# Altium PCB LC_MATCH_0.PcbDoc
Units mm, origin at the board's own origin, x right, y up, seen from the top; angles counter-clockwise.
Board outline 44.45 x 33.53 mm, 2 copper layers (Top Layer, Bottom Layer); 7 components, 5 nets, 14 pads, 12 vias.
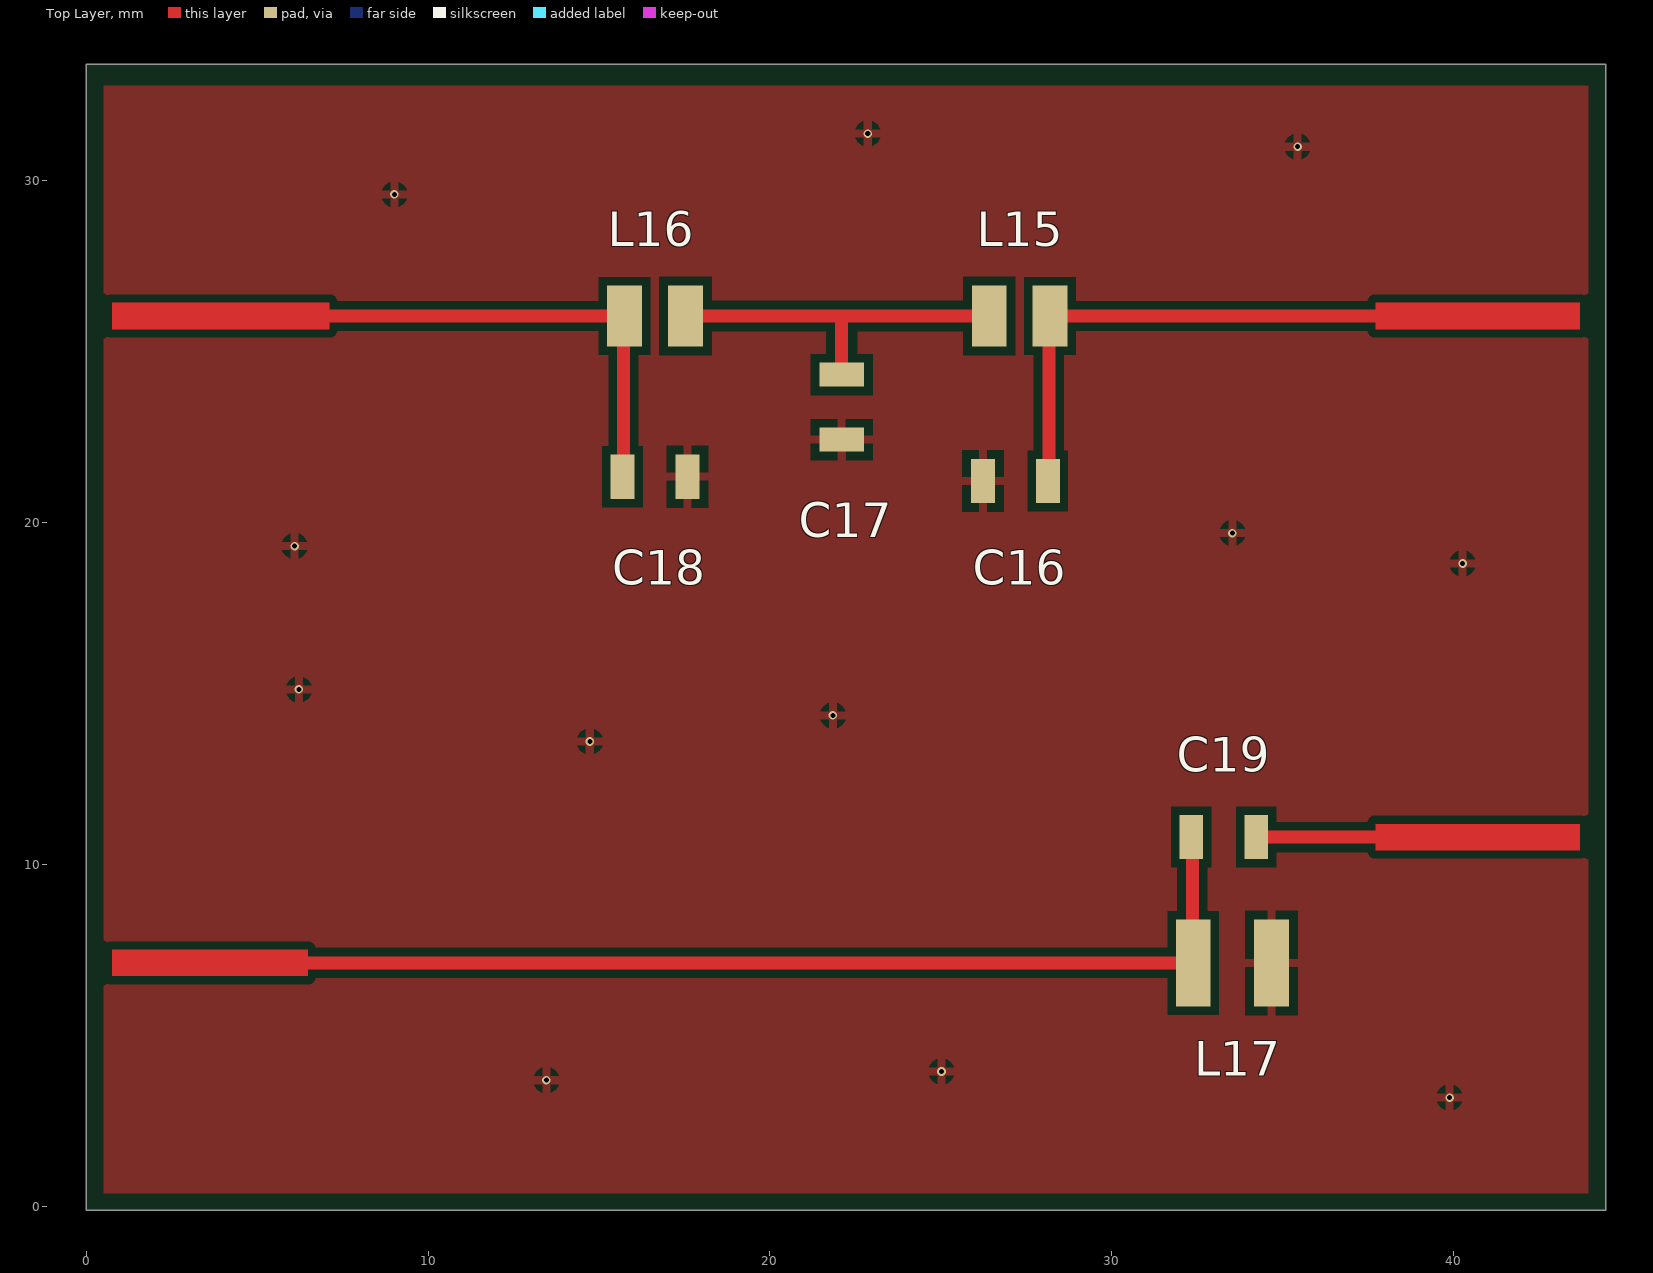
[diagram p0: Top Layer view]
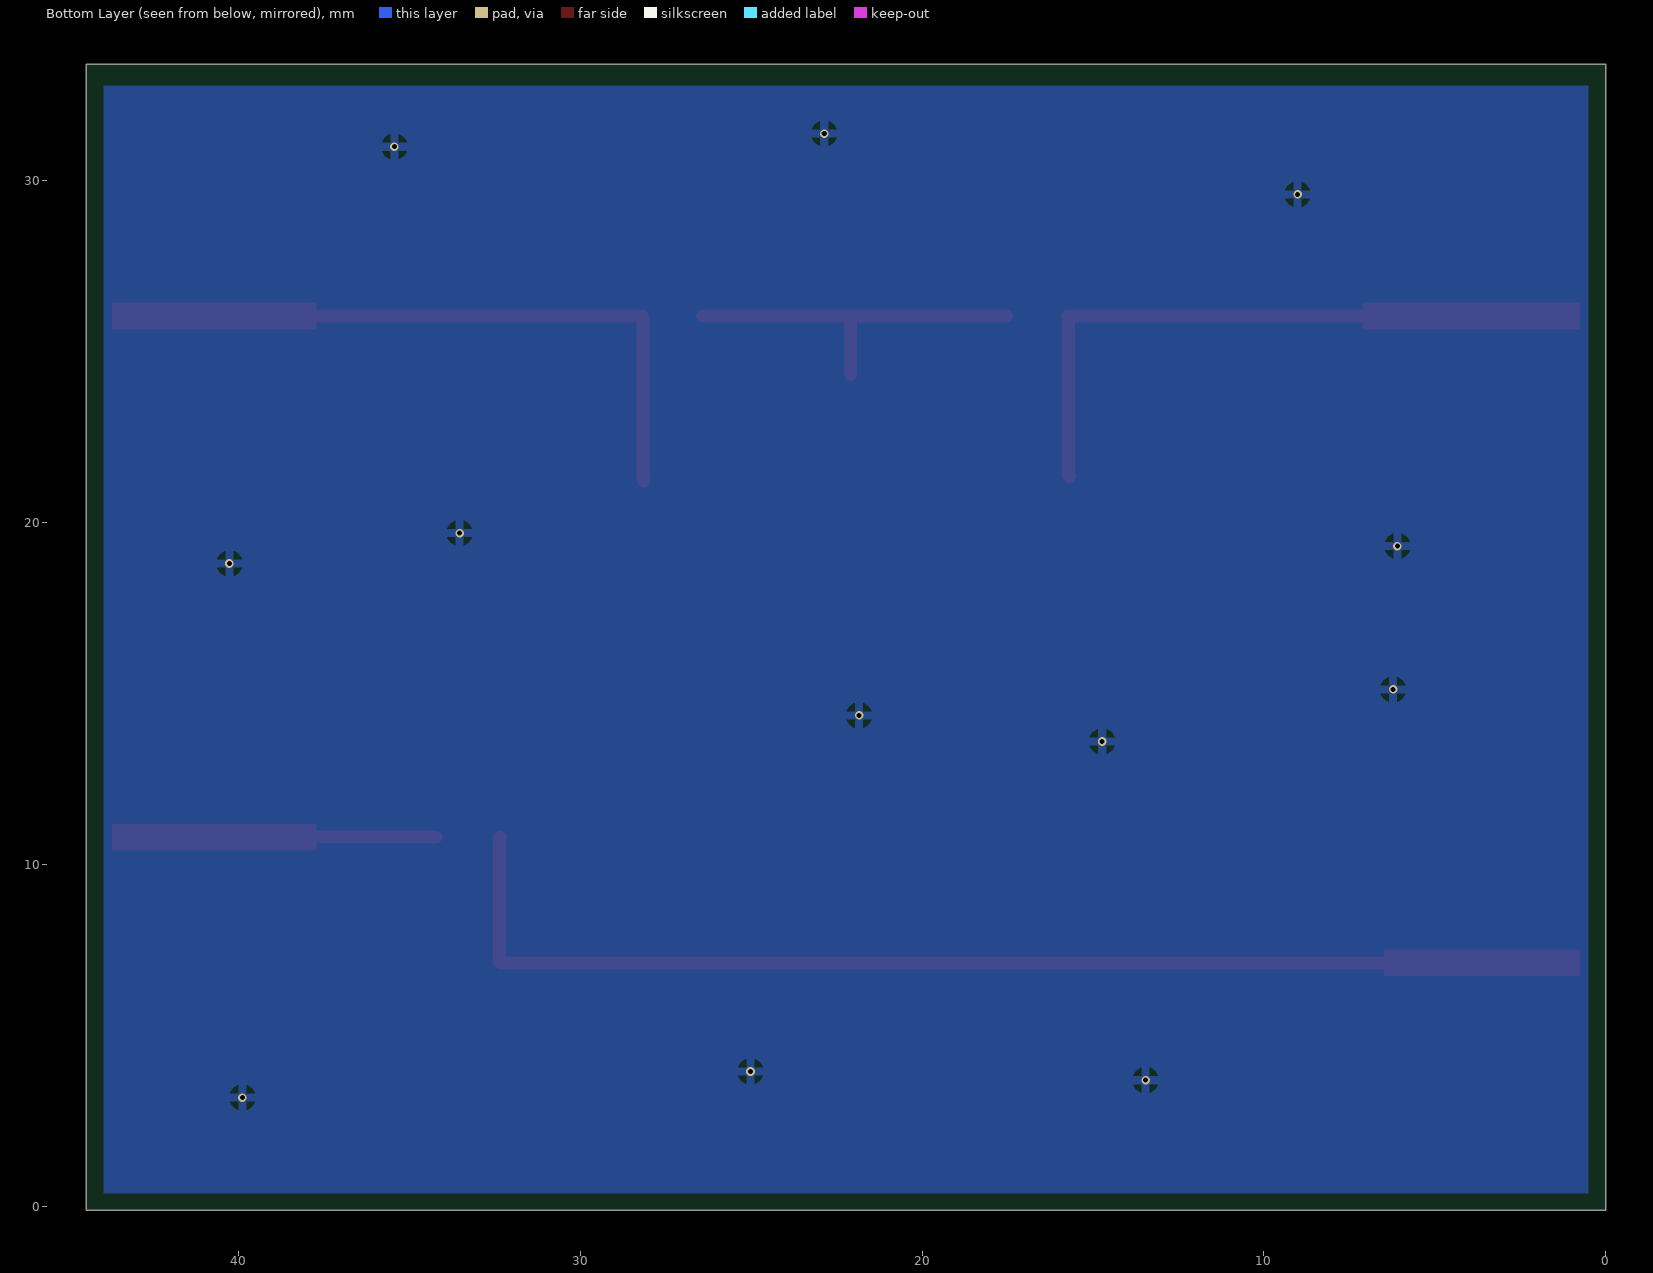
[diagram p1: Bottom Layer view, seen from below]
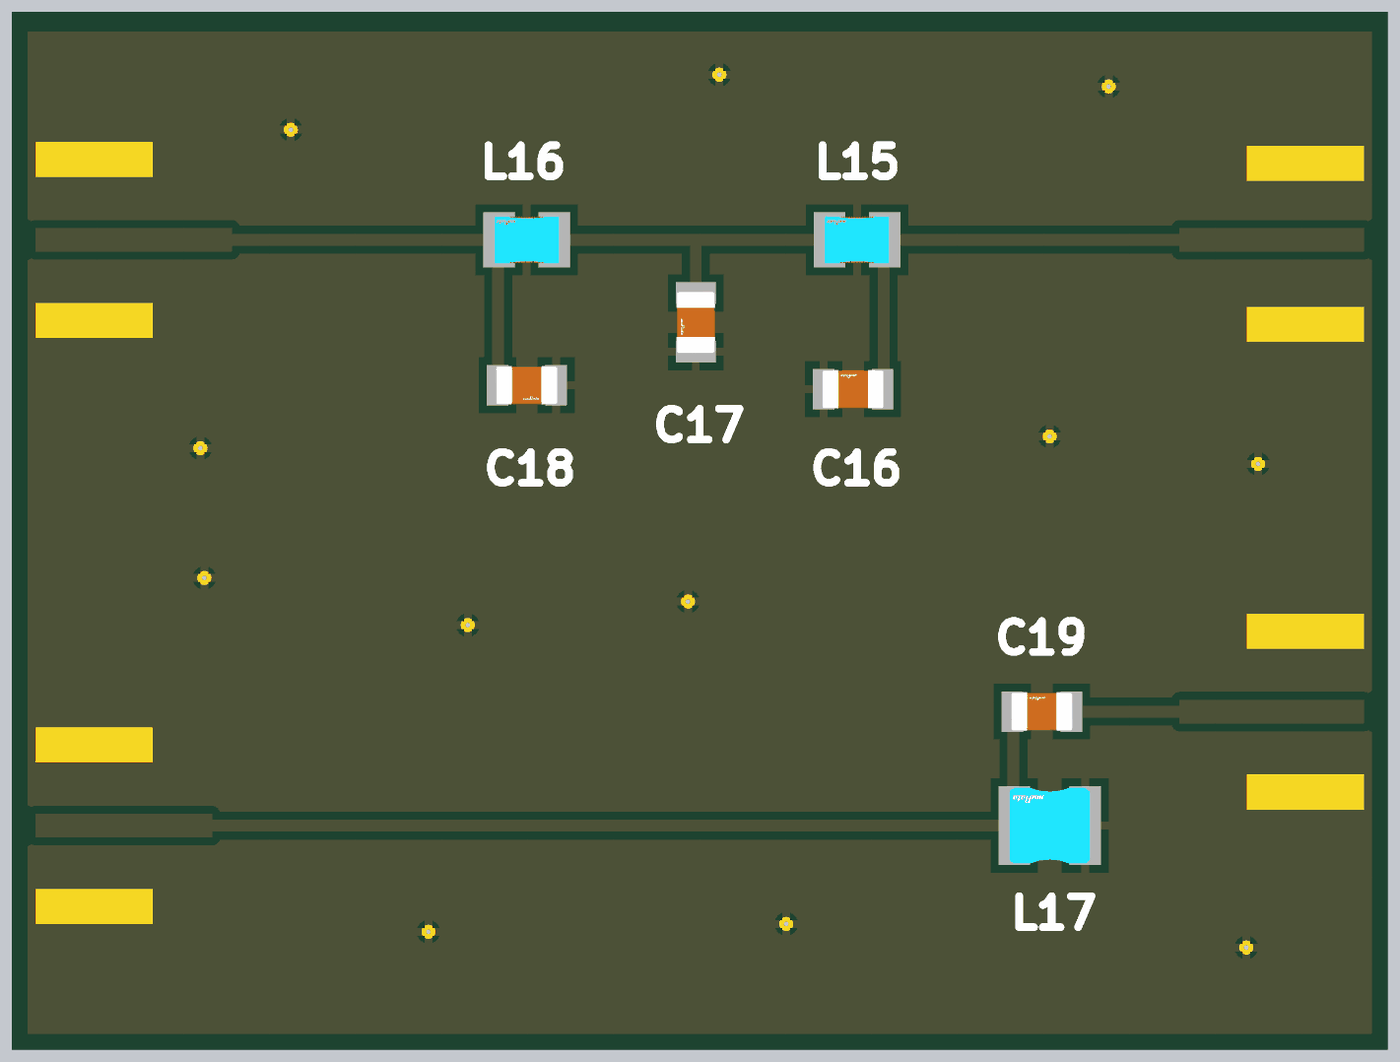
[diagram p2: 3D render of the assembled board from above, using the file's embedded part models]

## Layer stack, top to bottom
Top Solder: solder mask 0.0102, Solder Resist, Dk 3.5
Top Layer: signal copper 0.0356
Dielectric 1: dielectric 0.32, FR-4, Dk 4.8
Bottom Layer: signal copper 0.0356
Bottom Solder: solder mask 0.0102, Solder Resist, Dk 3.5

## Board outline
0,-0.127 44.45,-0.127 44.45,33.401 0,33.401

## Design rules (kind name [scope] priority, off if disabled: settings)
Clearance [All] p1: gap=0.254 ignorepadtopadclearanceinfootprint=FALSE except(0: Arc-Hole Track-Hole SMDPad-Hole THPad-Hole Via-Hole Fill-Hole Poly-Hole Region-Hole Text-Hole; 0.15: Arc-Arc Arc-Track Arc-SMDPad Track-Track Track-SMDPad SMDPad-SMDPad; 0.5: THPad-THPad)
MinimumSolderMaskSliver [All] p1: minsoldermaskwidth=0.1
PolygonConnect [All] p1: connectstyle=Relief reliefconductorwidth=0.254 reliefentries=4 polygonreliefangle="90 Angle" airgapwidth=0.254
RoutingLayers [All] p1: top layer_v5=TRUE bottom layer_v5=FALSE
RoutingVias [All] p1: holewidth=0.15 width=0.25 viastyle="Through Hole" minholewidth=0.15 minwidth=0.25 maxholewidth=0.2 maxwidth=0.3
SolderMaskExpansion [All] p1: expansion=0.102 istentingtop=FALSE
Width [All] p1: maxlimit=0.9 minlimit=0.15 preferedwidth=0.254 minimp=50.000000 maximp=50.000000 favimp=50.000000
28 further rules are at their usual default settings.

## Components (designator, comment, footprint, x,y, rotation, side; value= is the part's Value field where it differs from the comment)
C16 "GQM2195C2E300GB12D" FP-GRM21A-0_2-MFG 27.178,21.209 r180 top
C17 "GQM2195C2E430GB12D" FP-GRM21A-0_2-MFG 22.098,23.368 r270 top
C18 "GQM2195C2E300GB12D" FP-GRM21A-0_2-MFG 16.637,21.336 r0 top
C19 "GRM21A5C2E102FWA1D" FP-GRM21A-0_2-MFG 33.274,10.795 r180 top
L15 "LQW2BAS56NG00L" FP-LQW2BAN_00-MFG 27.305,26.035 r180 top
L16 "LQW2BAS56NG00L" FP-LQW2BAN_00-MFG 16.637,26.035 r180 top
L17 "LQW2UAS56NF00L" FP-LQW2UAS_00-MFG 33.527,7.112 r180 top

## Footprints (in the part's own frame and the unit in brackets; to place one, negate y for a bottom-side part, rotate by r counter-clockwise, add the part's x,y. Pads: shape width x height; smd on the part's side, far side on the other; paste and mask are expansions set on the pad)
FP-GRM21A-0_2-MFG [mm]
  rect 0.7x1.3 smd paste+0 mask+0: 1(-0.95,0) 2(0.95,0)
  body extent -1.4,-0.82 1.4,0.82, height 0.25
FP-LQW2BAN_00-MFG [mm]
  rect 1.02x1.78 smd paste+0 mask+0: 1(-0.89,0) 2(0.89,0)
  body extent -1.5,-0.99 1.5,0.99, height 0.25
FP-LQW2UAS_00-MFG [mm]
  rect 1.015x2.54 smd paste+0 mask+0: 1(-1.142,0) 2(1.142,0)
  body extent -1.75,-1.43 1.75,1.43, height 0.25

## Part data
C16 C17 C18 C19: library part CMP-06035-012030-1, "Chip Multilayer Ceramic Capacitors for General Purpose, 0805, 1000pF, C0G, 30ppm/°C, 1%, 250V"
L15 L16: library part CMP-06042-001883-1, "Wire Wound RF Inductor 56nH ±2% 500mA 0.34Ω 0805 (2015)", Case/Package=0805, Current Rating=500mA, DC Resistance (DCR)=340mR, Inductance=56nH, Max Operating Temperature=85°C, Min Operating Temperature=-40°C, Package Quantity=2000, Resistor Type=Wirewound, Self Resonant Frequency=1.6GHz, Test Frequency=200MHz, Tolerance=2%, Height - Seated (Max)=0.061inch, Length=0.082inch, Mount="Surface Mount", Packaging="Tape and Reel", Shielding=Unshielded, Width=0.06inch
L17: library part CMP-06042-009211-1, "Wire Wound RF Inductor 56nH ±1% 1000mA 0.18Ω 1008 (2520)"

## Via types
v1: diameter 0.25, hole 0.15, Top Layer to Bottom Layer, 12 vias

## Nets (pads, with @x,y where several pads share a name; then routed paths per layer and width w, separated by ;. In a path a pad name is that pad's centre, name@x,y a point inside that pad or via, vN(x,y) a via of type N, cw(c..) or ccw(c..) an arc to the next point about the centre after c; other vN are vias at no path point)
GND: C16.2 C17.2 C18.2 L17.1
  other v1: 39.878,3.175 13.462,3.683 25.019,3.937 14.732,13.589 21.844,14.351 6.223,15.113 40.259,18.796 6.096,19.304 33.528,19.685 9.017,29.591 35.433,30.988 22.86,31.369
NetC16_1: C16.1 L15.1 | length 14.4
  Top Layer w0.381: C16.1 28.162,21.243 28.162,26.001 L15.1 37.719,26.035
NetC17_1: C17.1 L15.2 L16.1 | length 10.4
  Top Layer w0.381: L16.1 21.875,26.035 L15.2 ; C17.1 22.098,25.812
NetC18_1: C18.1 L16.2 | length 13.4
  Top Layer w0.381: 7.112,26.035 L16.2 15.717,26.005 15.717,21.366 C18.1
NetC19_2: C19.2 L17.2 | length 29.6
  Top Layer w0.381: 6.477,7.112 32.324,7.112 32.354,7.143 32.354,10.764 C19.2
pads on no net: C19.1
copper on no net: | length 3.5
  Top Layer w0.381: 34.224,10.795 37.719,10.795

## Polygon pours and split planes (outlines as drawn)
GND on Bottom Layer "NONET_L-01_P-001" (solid, pour order 0): 0.508,32.766 43.942,32.766 43.942,0.381 0.508,0.381
no net on Top Solder "NONET_L-01_P-001" (solid): 39.887,7.631 43.679,7.631 43.679,8.763 39.887,8.763
no net on Top Solder "NONET_L-01_P-001" (solid): 39.887,12.827 43.679,12.827 43.679,13.959 39.887,13.959
no net on Top Solder "NONET_L-01_P-001" (solid): 39.887,22.733 43.679,22.733 43.679,23.865 39.887,23.865
no net on Top Solder "NONET_L-01_P-001" (solid): 39.887,27.94 43.679,27.94 43.679,29.072 39.887,29.072
no net on Top Solder "NONET_L-01_P-001" (solid): 0.771,28.067 4.563,28.067 4.563,29.199 0.771,29.199
no net on Top Solder "NONET_L-01_P-001" (solid): 0.771,22.86 4.563,22.86 4.563,23.992 0.771,23.992
no net on Top Solder "NONET_L-01_P-001" (solid): 0.771,3.937 4.563,3.937 4.563,5.069 0.771,5.069
no net on Top Solder "NONET_L-01_P-001" (solid): 0.771,9.155 4.563,9.155 4.563,10.287 0.771,10.287
GND on Top Layer "NONET_L-01_P-001" (solid, pour order 1): 0.508,32.766 43.942,32.766 43.942,0.381 0.508,0.381
no net on Bottom Solder "NONET_L-01_P-001" (solid): 1.016,2.794 2.921,2.794 2.921,1.016 1.016,1.016

## Other copper
Top Layer:
  region: 37.719,11.176 43.688,11.176 43.688,10.414 37.719,10.414
  region net NetC16_1: 37.719,26.416 43.688,26.416 43.688,25.654 37.719,25.654
  region net NetC19_2: 6.477,7.493 0.762,7.493 0.762,6.731 6.477,6.731
  region net NetC18_1: 7.112,26.416 0.762,26.416 0.762,25.654 7.112,25.654

## Silkscreen, mask and mechanical layers (free items; w line width, h text height)
Mechanical 1:
  lines w0.254: 44.069,0.127 32.861,0.127 11.462,0.127 10.269,0.127 9.408,0.127 8.215,0.127 3.246,0.127 0.254,0.127 0.254,33.02 0.635,33.02 11.43,33.02 33.02,33.02 44.069,33.02 ; 44.196,0.127 44.196,2.667 44.196,6.223 44.196,8.763 44.196,24.511 44.196,32.893